# Altium PCB PCB1.PcbDoc
Units mm, origin at the board's own origin, x right, y up, seen from the top; angles counter-clockwise.
Board outline 152.4 x 101.6 mm, 2 copper layers (Top Layer, Bottom Layer); 45 components, 31 nets, 208 pads, 0 vias.
Unrouted connection lines stored in the file: 113.
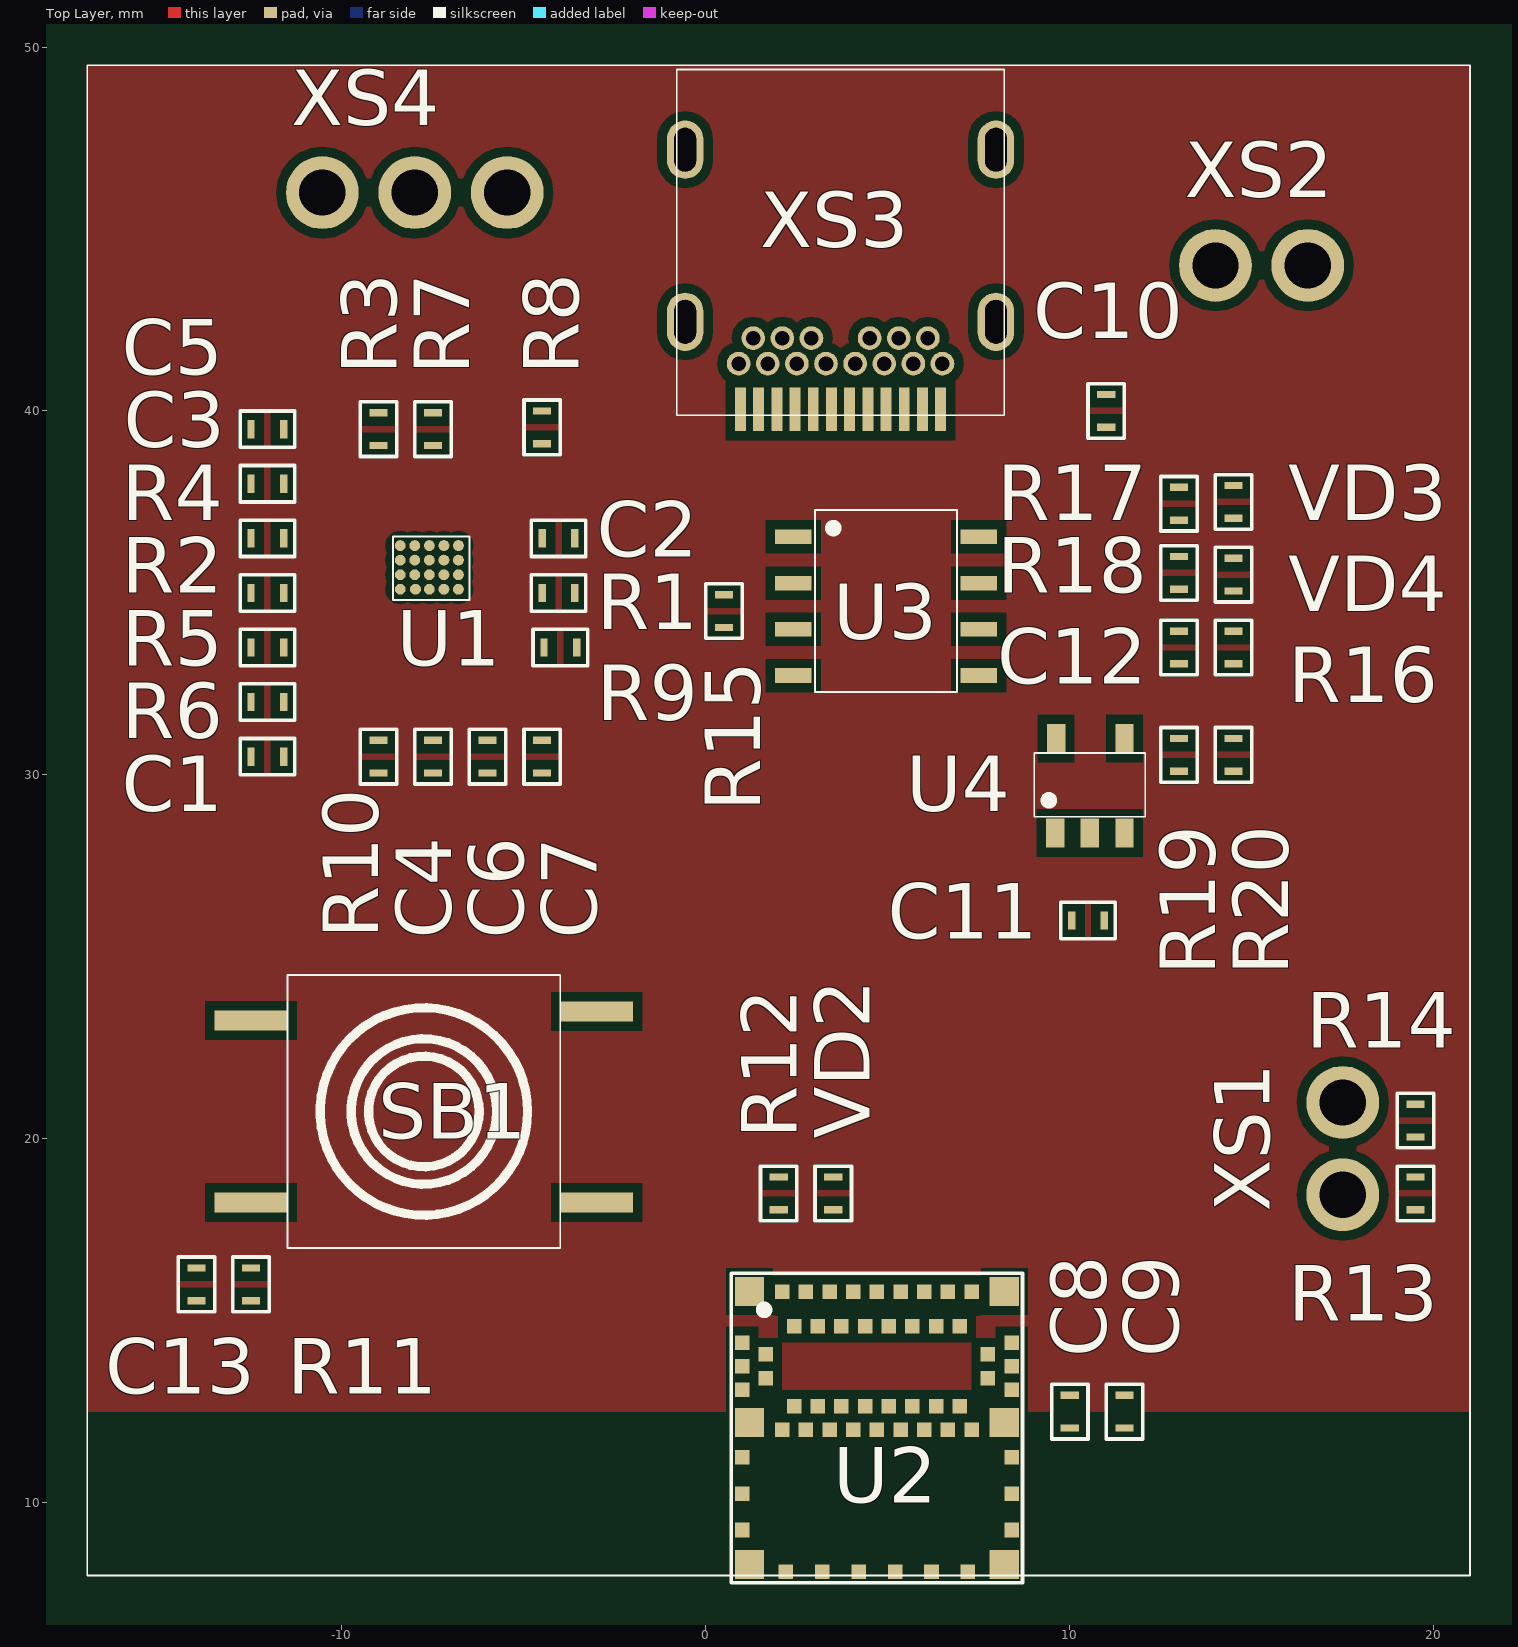
[diagram p0: Top Layer view]
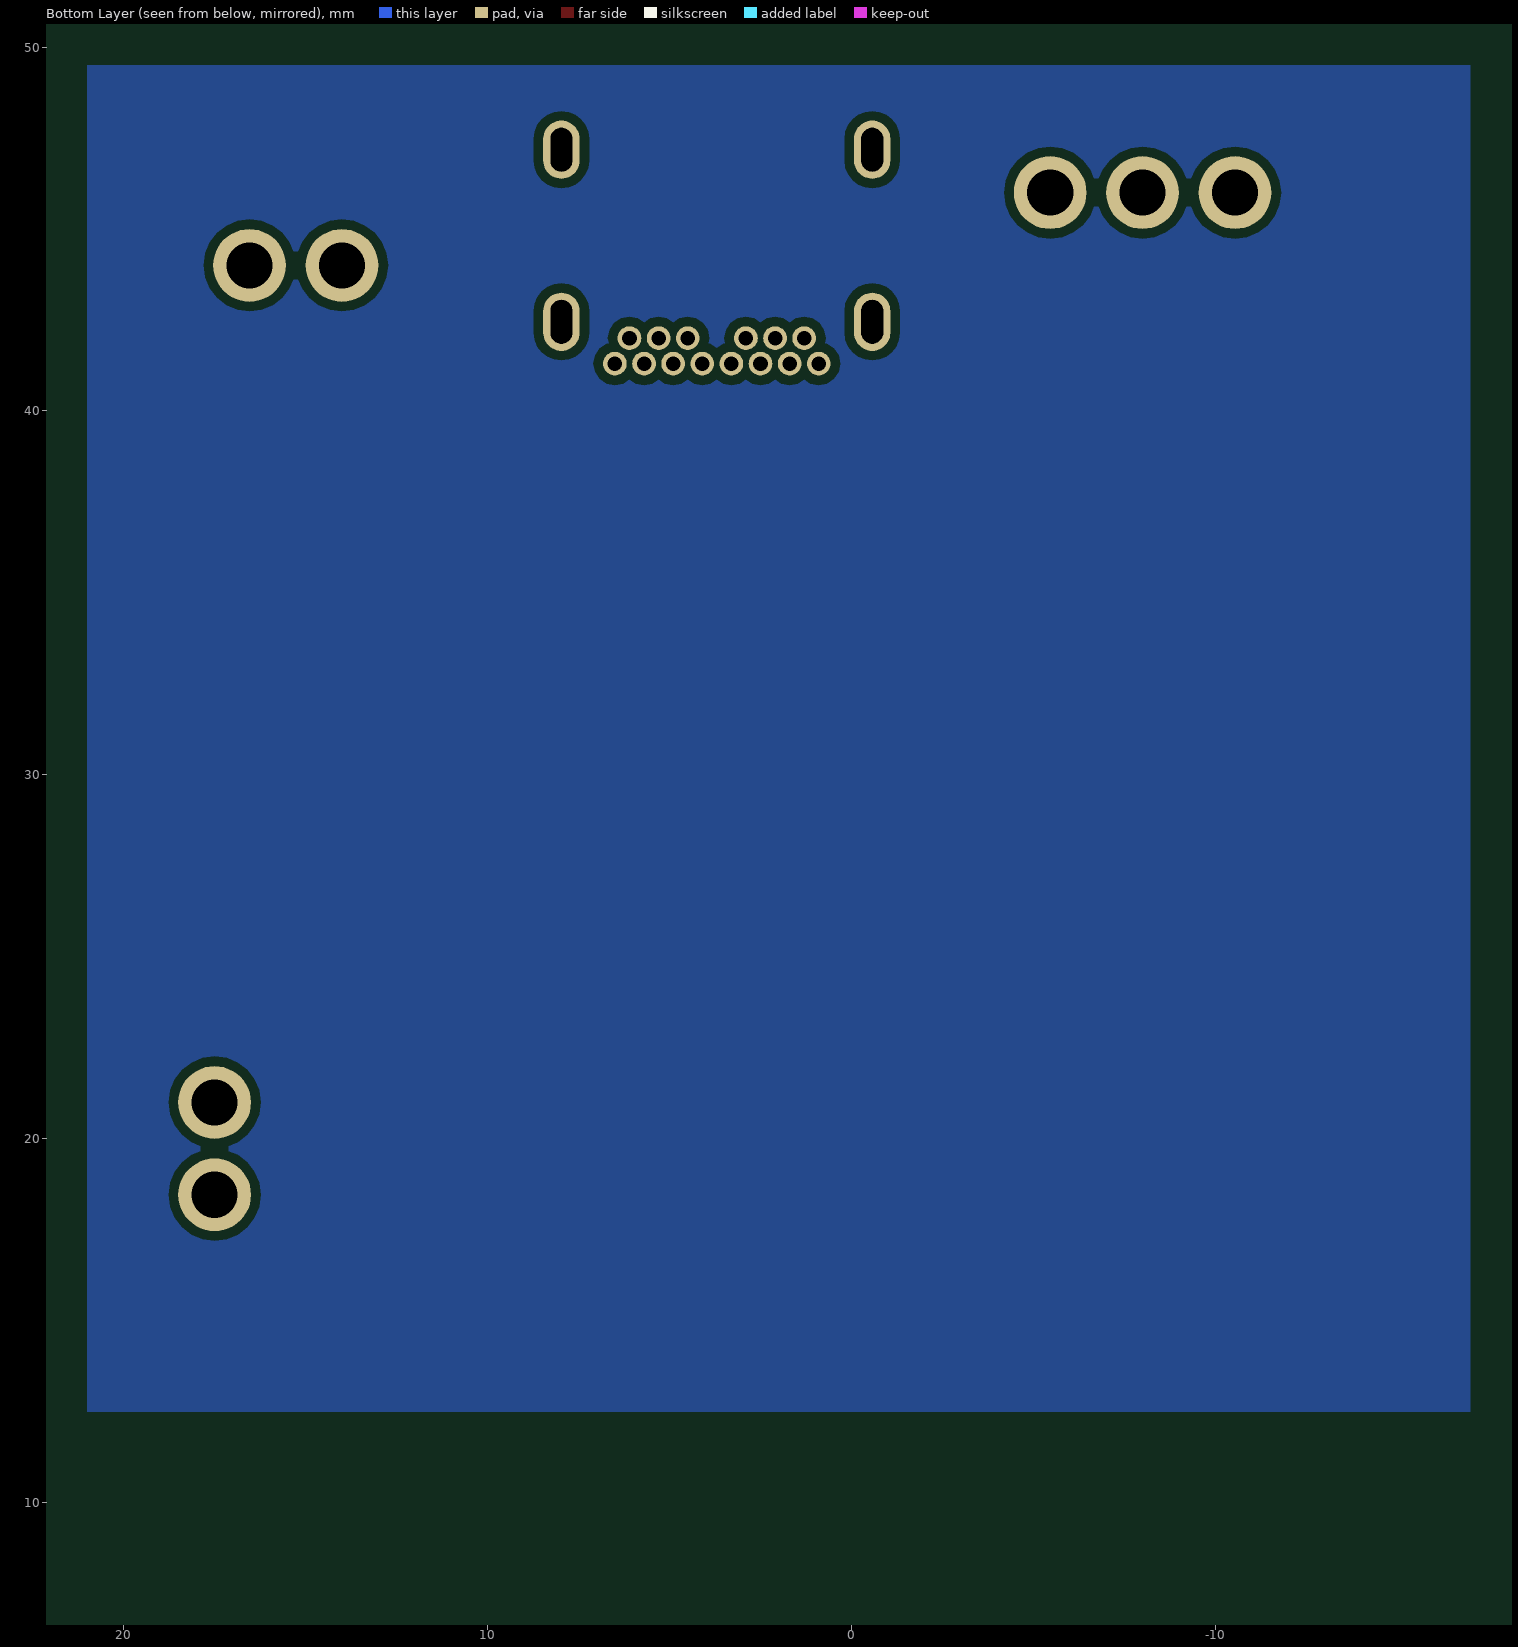
[diagram p1: Bottom Layer view, seen from below]

## Layer stack, top to bottom
Top Solder: solder mask 0.0102, Solder Resist, Dk 3.5
Top Layer: signal copper 0.0356
Dielectric 1: dielectric 0.32, FR-4, Dk 4.8
Bottom Layer: signal copper 0.0356
Bottom Solder: solder mask 0.0102, Solder Resist, Dk 3.5

## Board outline
-59.6,-19.6 92.8,-19.6 92.8,82 -59.6,82

## Design rules (kind name [scope] priority, off if disabled: settings)
Clearance [All] p1: gap=0.254 ignorepadtopadclearanceinfootprint=FALSE except(0: Arc-Hole Track-Hole SMDPad-Hole THPad-Hole Via-Hole Fill-Hole Poly-Hole Region-Hole Text-Hole)
PolygonConnect [All] p1: connectstyle=Relief reliefconductorwidth=0.254 reliefentries=4 polygonreliefangle="90 Angle" airgapwidth=0.254
RoutingVias [All] p1: holewidth=0.711 width=1.27 viastyle="Through Hole" minholewidth=0.711 minwidth=1.27 maxholewidth=0.711 maxwidth=1.27
SolderMaskExpansion [All] p1: expansion=0.102
Width [All] p1: maxlimit=0.254 minlimit=0.254 preferedwidth=0.254
30 further rules are at their usual default settings.

## Classes and differential pairs
component class Designator: C1 C2 C3 C4 C5 C6 C7 R1 R2 R3 R4 R5 R6 R7 R8 R9 R10 U1 XS4

## Components (designator, comment, footprint, x,y, rotation, side; value= is the part's Value field where it differs from the comment)
C1 "Конденсатор" 0402 -12.05,30.5 r0 top
C2 "1000pF" 0402 -4.05,36.5 r0 top
C3 "0.022uF" 0402 -12.05,38 r0 top
C4 "0.22uF" 0402 -7.5,30.5 r270 top
C5 "0.22uF" 0402 -12.05,39.5 r0 top
C6 "0.1uF" 0402 -6,30.5 r90 top
C7 "0.1uF" 0402 -4.5,30.5 r90 top
C8 "100nF" 0402 10,12.5 r90 top
C9 "1uF" 0402 11.5,12.5 r90 top
C10 "10uF" 0402 11,40 r90 top
C11 "1uF" 0402 10.5,26 r180 top
C12 "10uF" 0402 13,33.5 r90 top
C13 "100nF" 0402 -14,16 r90 top
R1 "360K" 0402 -4.05,35 r0 top
R2 "1M" 0402 -12.05,35 r0 top
R3 "10M" 0402 -9,39.5 r90 top
R4 "100K" 0402 -12.05,36.5 r0 top
R5 "100K" 0402 -12.05,33.5 r0 top
R6 "1M" 0402 -12.05,32 r0 top
R7 "10M" 0402 -7.5,39.5 r90 top
R8 "1M" 0402 -4.5,39.55 r90 top
R9 "10M" 0402 -4,33.5 r0 top
R10 "10M" 0402 -9,30.5 r90 top
R11 "10K" 0402 -12.5,16 r270 top
R12 "500" 0402 2,18.5 r90 top
R13 "10K" 0402 19.5,18.5 r270 top
R14 "10K" 0402 19.5,20.5 r90 top
R15 "2K" 0402 0.5,34.5 r90 top
R16 "1K" 0402 13,35.55 r90 top
R17 "1K" 0402 13,37.45 r90 top
R18 "0.4" 0402 14.5,33.5 r90 top
R19 "301K" 0402 13,30.55 r90 top
R20 "169K" 0402 14.5,30.55 r90 top
SB1 "Тактовая кнопка" 2565 -4,17 r180 top
U1 "AD8233" WLCSP -8.58,36.552 r0 top (schematic designator U?)
U2 "ISP1507-AL" "LGA QFN" 0.7,15.8 r0 top
U3 "TP4056" SOP-8 3,37.28 r0 top
U4 "TPS76333DBVT" SOT23-5 9.025,30.6 r0 top
VD2 "Event" 0402 3.5,18.5 r90 top
VD3 "Светодиод" 0402 14.5,37.5 r90 top
VD4 "Светодиод" 0402 14.5,35.5 r90 top
XS1 "Разъем для программатора" "PIN 2" 17.5,18.46 r90 top
XS2 "Разъем аккумулятора" "PIN 2" 14,44 r0 top
XS3 "Разъем Type C" "USB Type C" 3.7,50.63 r180 top
XS4 "Разъем 3" "PIN 3" -10.54,46 r0 top

## Footprints (in the part's own frame and the unit in brackets; to place one, negate y for a bottom-side part, rotate by r counter-clockwise, add the part's x,y. Pads: shape width x height; smd on the part's side, far side on the other; paste and mask are expansions set on the pad)
0402 [mm]
  rect 0.2x0.5 smd: 1(-0.45,0) 2(0.45,0)
  silkscreen extent -0.75,-0.5 0.75,0.5
2565 [mm]
  rect 2x0.55 smd: 1(-1,-1.25) 1(8.5,-1.25) 2(-1,-6.5) 2(8.5,-6.25)
  silkscreen extent 0,-7.5 7.5,0
"LGA QFN" [mm]
  rect 0.8x0.8 smd: 1(0.5,0) 7(0.5,-3.6) 25(7.5,-3.6) 31(7.5,0) 52(0.5,-7.5) 59(7.5,-7.5)
  rect 0.4x0.4 smd: 2(0.3,-1.4) 3(0.95,-1.725) 4(0.3,-2.05) 5(0.95,-2.375) 6(0.3,-2.7) 8(1.4,-3.8) 9(1.725,-3.15) 10(2.05,-3.8) 11(2.375,-3.15) 12(2.7,-3.8) 13(3.025,-3.15) 14(3.35,-3.8) 15(3.675,-3.15) 16(4,-3.8) 17(4.325,-3.15) 18(4.65,-3.8) 19(4.975,-3.15) 20(5.3,-3.8) 21(5.625,-3.15) 22(5.95,-3.8) 23(6.275,-3.15) 24(6.6,-3.8) 26(7.7,-2.7) 27(7.05,-2.375) 28(7.7,-2.05) 29(7.05,-1.725) 30(7.7,-1.4) 32(6.6,0) 33(6.275,-0.95) 34(5.95,0) 35(5.625,-0.95) 36(5.3,0) 37(4.975,-0.95) 38(4.65,0) 39(4.325,-0.95) 40(4,0) 41(3.675,-0.95) 42(3.35,0) 43(3.025,-0.95) 44(2.7,0) 45(2.375,-0.95) 46(2.05,0) 47(1.725,-0.95) 48(1.4,0) 49(0.3,-4.55) 50(0.3,-5.55) 51(0.3,-6.55) 53(1.5,-7.7) 54(2.5,-7.7) 55(3.5,-7.7) 56(4.5,-7.7) 57(5.5,-7.7) 58(6.5,-7.7) 60(7.7,-6.55) 61(7.7,-5.55) 62(7.7,-4.55)
  silkscreen extent 0,-8 8,0.5
"PIN 2" [mm]
  round 2 hole 1.27: 1(0,0) 2(2.54,0)
"PIN 3" [mm]
  round 2 hole 1.27: 1(0,0) 2(2.54,0) 3(5.08,0)
SOP-8 [mm]
  rect 1x0.4 smd: 1(-0.6,-0.74) 2(-0.6,-2.01) 3(-0.6,-3.28) 4(-0.6,-4.55) 5(4.5,-0.74) 6(4.5,-2.01) 7(4.5,-3.28) 8(4.5,-4.55)
  silkscreen extent 0,-5 3.9,0
SOT23-5 [mm]
  rect 0.5x0.8 smd: 1(0.575,-2.2) 2(1.525,-2.2) 3(2.475,-2.2) 4(2.475,0.4) 5(0.6,0.4)
  silkscreen extent 0,-1.75 3.05,0
"USB Type C" [mm]
  rect 0.3x1.2 smd: A1(-2.75,10.58) A2(-2.25,10.58) A3(-1.75,10.58) A4(-1.25,10.58) A5(-0.75,10.58) A6(-0.25,10.58) A7(0.25,10.58) A8(0.75,10.58) A9(1.25,10.58) A10(1.75,10.58) A11(2.25,10.58) A12(2.75,10.58)
  round 0.65 hole 0.4: B1(2.8,9.33) B2(2.4,8.63) B3(1.6,8.63) B4(1.2,9.33) B5(0.8,8.63) B6(0.4,9.33) B7(-0.4,9.33) B8(-0.8,8.63) B9(-1.2,9.33) B10(-1.6,8.63) B11(-2.4,8.63) B12(-2.8,9.33) ""(-2,9.33) ""(2,9.33)
  oval 1x1.6 hole 1.2 slot 0.6 at 0 deg: ""(-4.27,3.45) ""(-4.27,8.18) ""(4.27,3.45) ""(4.27,8.18)
  silkscreen extent -4.5,1.25 4.5,10.75
WLCSP [mm]
  round 0.3 smd: A1(0.18,-0.252) A2(0.58,-0.252) A3(0.98,-0.252) A4(1.38,-0.252) A5(1.78,-0.252) B1(0.18,-0.652) B2(0.58,-0.652) B3(0.98,-0.652) B4(1.38,-0.652) B5(1.78,-0.652) C1(0.18,-1.052) C2(0.58,-1.052) C3(0.98,-1.052) C4(1.38,-1.052) C5(1.78,-1.052) D1(0.18,-1.452) D2(0.6,-1.452) D3(0.98,-1.452) D4(1.38,-1.452) D5(1.78,-1.452)
  silkscreen extent -0.02,-1.75 2.08,0

## Part data
C2 C3 C4 C5 C6 C7 C8 C9 C10 C11 C12 C13: library part Конденсатор
R1 R2 R3 R4 R5 R6 R7 R8 R9 R10 R11 R12 R13 R14 R15 R16 R17 R18 R19 R20: library part Резистор
U2: library part ISP1507
VD2: library part Светодиод
XS1 XS2: library part "Разъем 2"

## Nets (pads, with @x,y where several pads share a name; then routed paths per layer and width w, separated by ;. In a path a pad name is that pad's centre, name@x,y a point inside that pad or via, vN(x,y) a via of type N, cw(c..) or ccw(c..) an arc to the next point about the centre after c; other vN are vias at no path point)
+3.3V: C7.2 C8.2 C9.2 R3.2 R7.2 R9.2 R10.2 R11.2 R13.2 R19.2 U1.A3 U1.C2 U2.26 U4.5 VD2.1
+5V: R18.2 U3.4 U3.8 VD3.1 VD4.1 XS3.A4 XS3.A9 XS3.B4 XS3.B9
Bat+: C10.2 C11.2 U3.5 U4.1 U4.3 XS2.1
Control_button: C13.2 R11.1 SB1.1 U2.36
GND: C6.1 C7.1 C8.1 C9.1 C10.1 C11.1 C12.1 C13.1 R10.1 R14.1 R15.1 R20.1 SB1.2 U1.A1 U1.B2 U1.B3 U2.1 U2.7 U2.8 U2.10 U2.12 U2.14 U2.16 U2.18 U2.21 U2.23 U2.24 U2.25 U2.31 U3.1 U3.3 U4.2 XS2.2 XS3.A1 XS3.A12 XS3.B1 XS3.B12
LA: R7.1 U1.B5 XS4.1
NetC1_2: C1.2 C3.2 C4.1 R2.1 R2.2 R4.2 U1.D3 U1.D4
NetC2_1: C2.1 U1.C4
NetC2_2: C2.2 R1.1 U1.D5
NetC3_1: C3.1 R4.1 R5.2 U1.C3
NetC4_2: C4.2 R8.1 U1.B4
NetC5_1: C5.1 R8.2 U1.A4
NetC5_2: C5.2 U1.A5
NetC6_2: C6.2 R9.1 U1.A2
NetC12_2: C12.2 R18.1
NetR5_1: R5.1 R6.2 U1.D2
NetR12_1: R12.1 U2.48
NetR12_2: R12.2 VD2.2
NetR15_2: R15.2 U3.2
NetR16_1: R16.1 U3.7
NetR16_2: R16.2 VD3.2
NetR17_1: R17.1 U3.6
NetR17_2: R17.2 VD4.2
NetR19_1: R19.1 R20.2 U4.4
NetU2_20: U2.20 U2.22
OUT: C1.1 R6.1 U1.D1 U2.38
RA: R3.1 U1.C5 XS4.2
RL: R1.2 XS4.3
SDN: U2.2
SWCLK: R14.2 U2.30 XS1.2
SWDIO: R13.1 U2.28 XS1.1
pads on no net: U1.B1 U1.C1 U2.3 U2.4 U2.5 U2.6 U2.9 U2.11 U2.13 U2.15 U2.17 U2.19 U2.27 U2.29 U2.32 U2.33 U2.34 U2.35 U2.37 U2.39 U2.40 U2.41 U2.42 U2.43 U2.44 U2.45 U2.46 U2.47 U2.49 U2.50 U2.51 U2.52 U2.53 U2.54 U2.55 U2.56 U2.57 U2.58 U2.59 U2.60 U2.61 U2.62 XS3. XS3.A2 XS3.A3 XS3.A5 XS3.A6 XS3.A7 XS3.A8 XS3.A10 XS3.A11 XS3.B2 XS3.B3 XS3.B5 XS3.B6 XS3.B7 XS3.B8 XS3.B10 XS3.B11

## Polygon pours and split planes (outlines as drawn)
no net on Top Layer (solid, pour order 4): 31.5,36.5
no net on Top Layer (solid, pour order 2): 31.5,32
no net on Top Layer (solid, pour order 0): -17,49.5 21,49.5 21,12.5 -17,12.5
no net on Bottom Layer (solid, pour order 8): -25.5,43.5
no net on Bottom Layer (solid, pour order 6): -17,49.5 21,49.5 21,12.5 -17,12.5

## Silkscreen, mask and mechanical layers (free items; w line width, h text height)
Top Overlay:
  lines w0.05: -17,8 21,8 21,49.5 -17,49.5 -17,8